# Altium PCB DS137-1.0-B二氧化硫传感器.PcbDoc
Units mil, origin at the board's own origin, x right, y up, seen from the top; angles counter-clockwise.
Board outline 1614.17 x 2519.69 mil, 2 copper layers (Top Layer, Bottom Layer); 18 components, 29 nets, 77 pads, 52 vias.
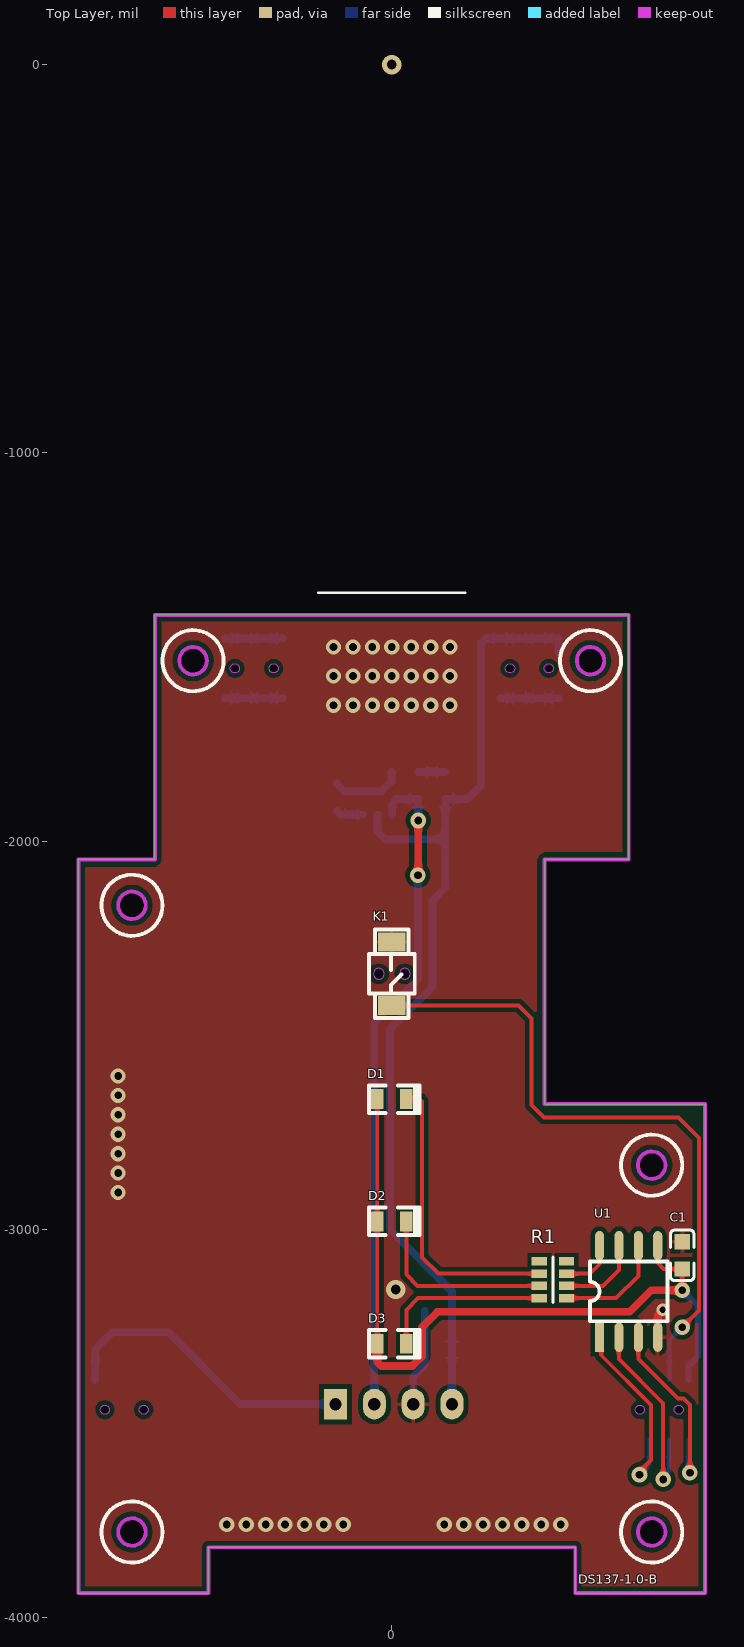
[diagram p0: Top Layer view]
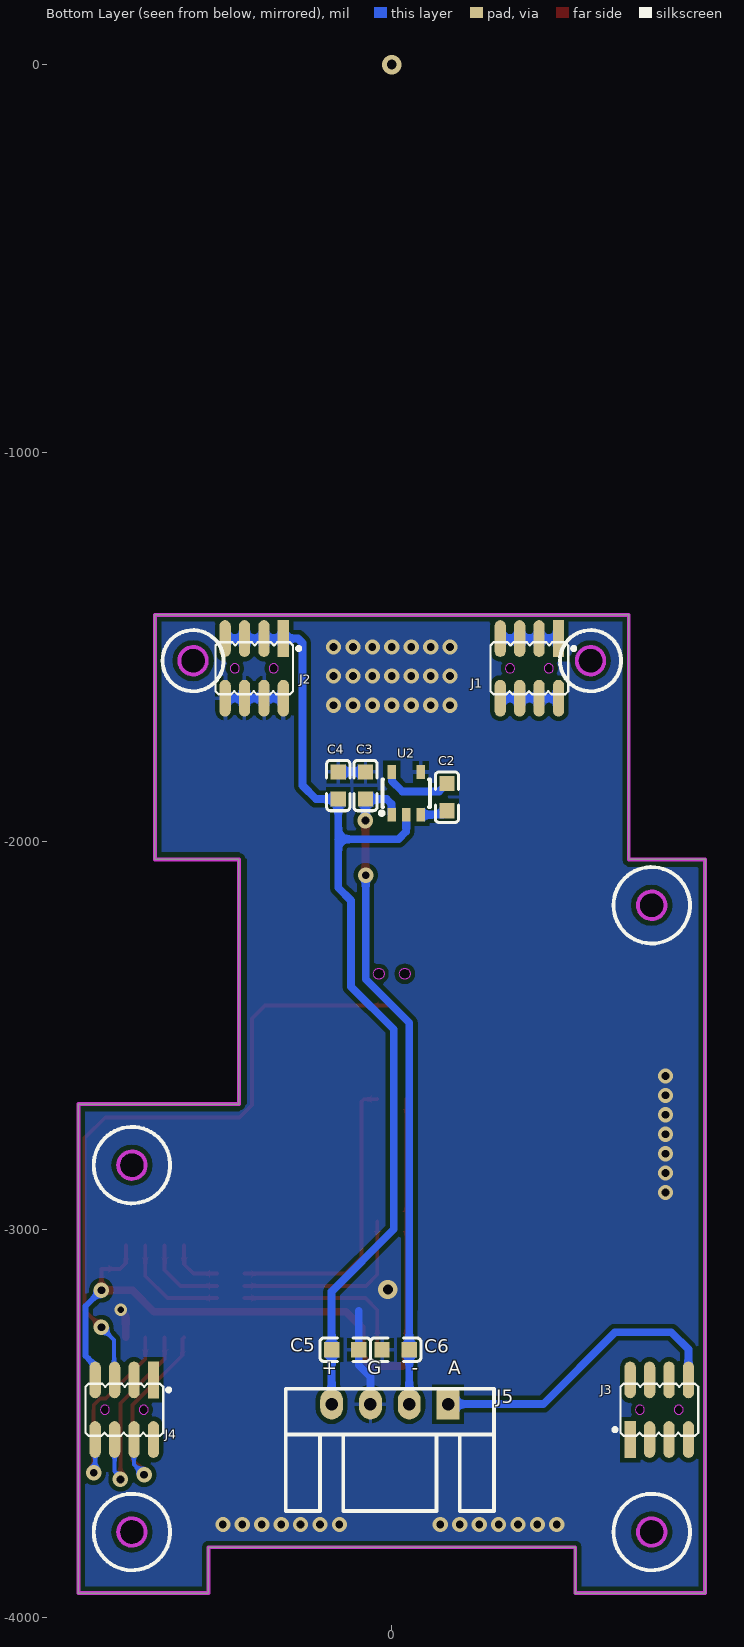
[diagram p1: Bottom Layer view, seen from below]
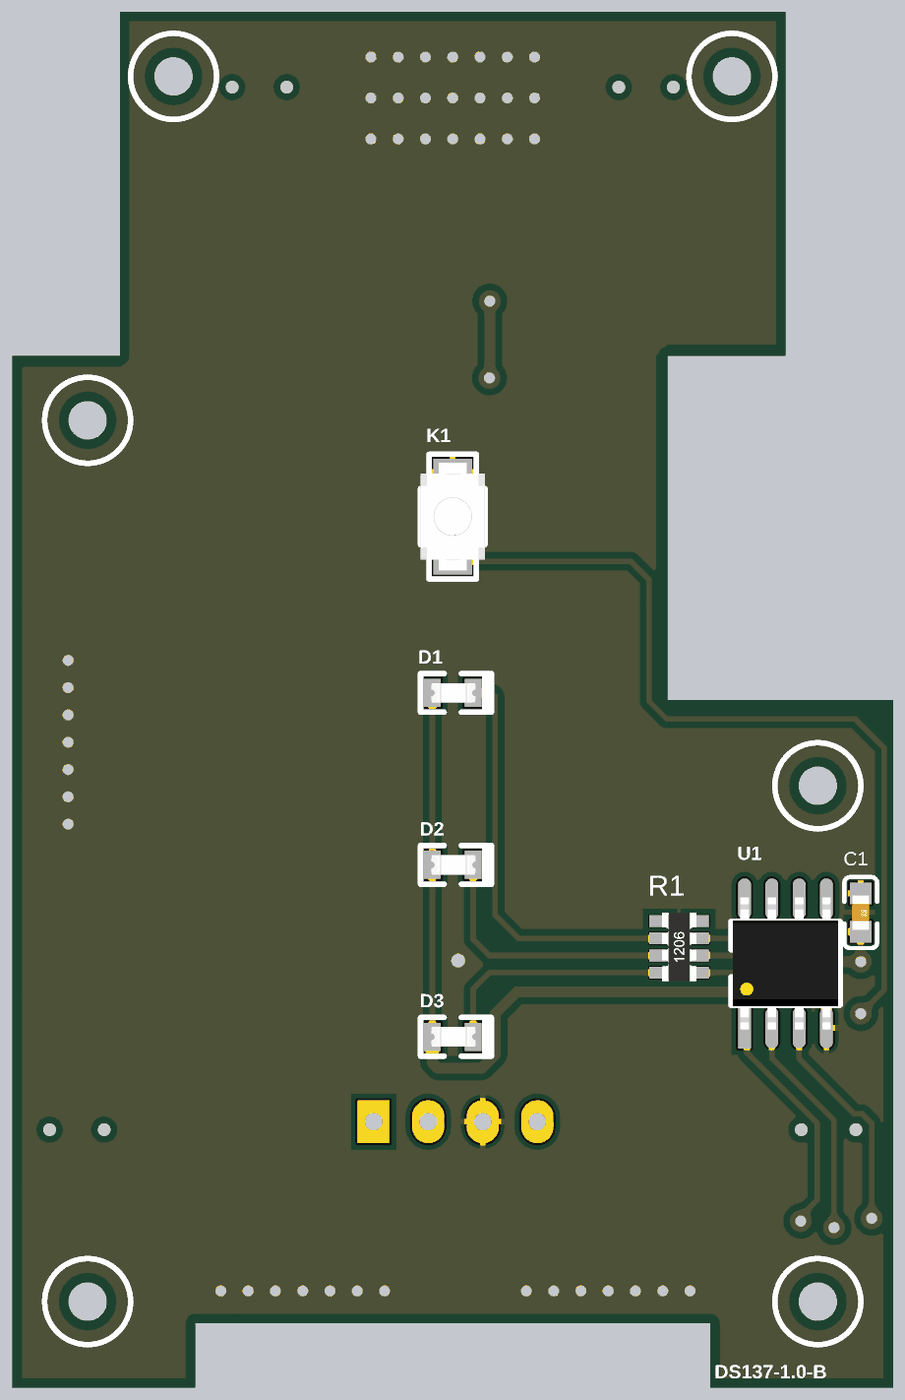
[diagram p2: 3D render of the assembled board from above, using the file's embedded part models]
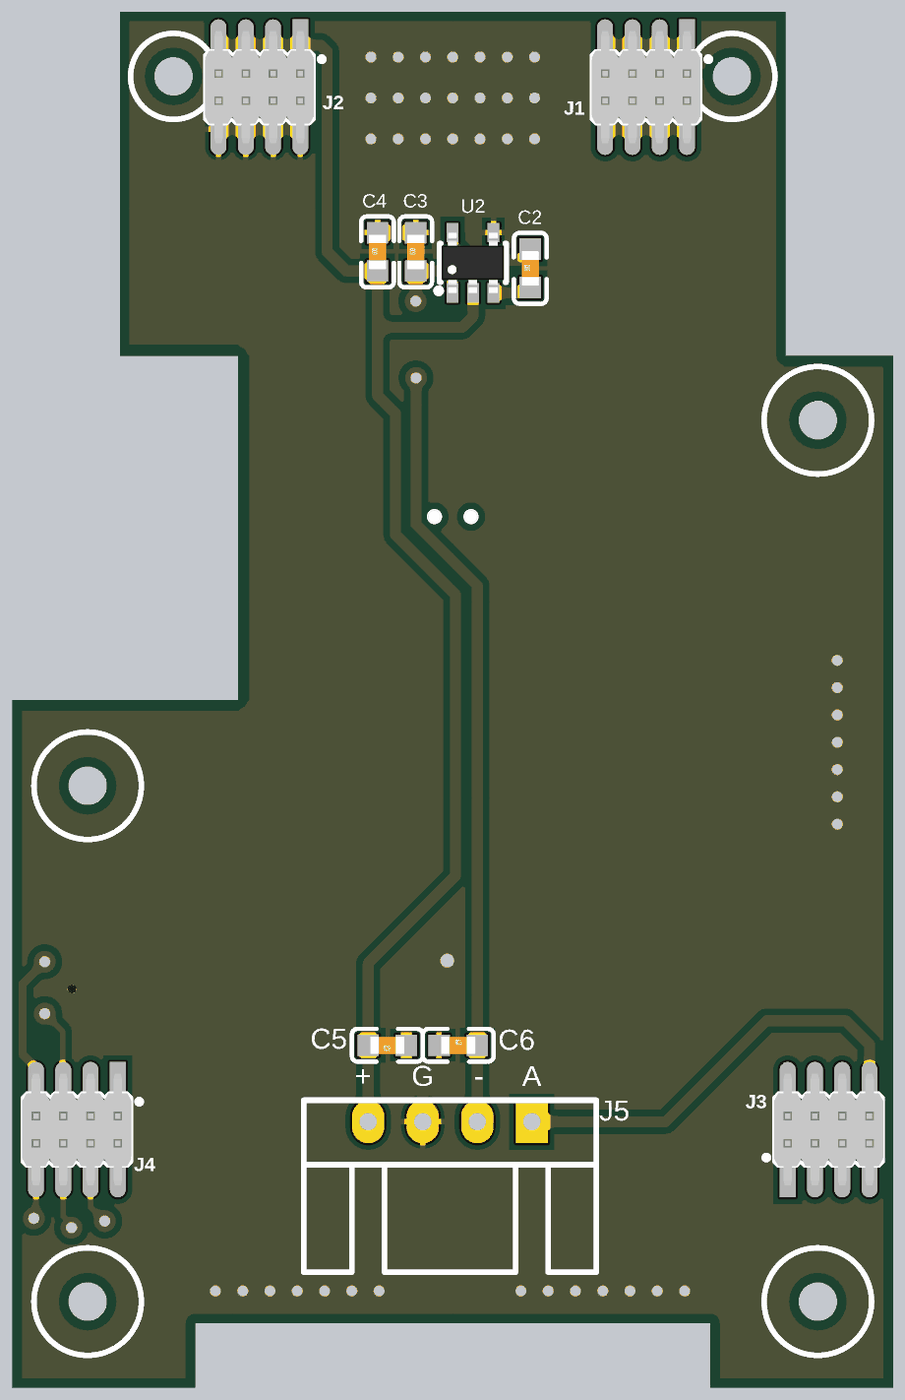
[diagram p3: 3D render of the assembled board from below, using the file's embedded part models]

## Layer stack, top to bottom
Top Solder: solder mask 0.4, Solder Resist, Dk 3.5
Top Layer: signal copper 1.4
Dielectric 1: dielectric 12.6, FR-4, Dk 4.8
Bottom Layer: signal copper 1.4
Bottom Solder: solder mask 0.4, Solder Resist, Dk 3.5

## Board outline
-807.09,-3937.01 -807.09,-2047.24 -610.24,-2047.24 -610.24,-1417.32 610.24,-1417.32 610.24,-2047.24 393.7,-2047.24 393.7,-2677.17 807.09,-2677.17 807.09,-3937.01 472.44,-3937.01 472.44,-3818.9 -472.44,-3818.9 -472.44,-3937.01
cut-out: 633.86,-3779.53 ccw(c669.29,-3779.53) 669.29,-3814.96 ccw(c669.29,-3779.53) 704.72,-3779.53 ccw(c669.29,-3779.53) 669.29,-3744.09 ccw(c669.29,-3779.53)
cut-out: -704.72,-3779.53 ccw(c-669.29,-3779.53) -669.29,-3814.96 ccw(c-669.29,-3779.53) -633.86,-3779.53 ccw(c-669.29,-3779.53) -669.29,-3744.09 ccw(c-669.29,-3779.53)
cut-out: 633.86,-2834.65 ccw(c669.29,-2834.65) 669.29,-2870.08 ccw(c669.29,-2834.65) 704.72,-2834.65 ccw(c669.29,-2834.65) 669.29,-2799.21 ccw(c669.29,-2834.65)
cut-out: -704.72,-2165.35 ccw(c-669.29,-2165.35) -669.29,-2200.79 ccw(c-669.29,-2165.35) -633.86,-2165.35 ccw(c-669.29,-2165.35) -669.29,-2129.92 ccw(c-669.29,-2165.35)
cut-out: 476.38,-1535.43 ccw(c511.81,-1535.43) 511.81,-1570.87 ccw(c511.81,-1535.43) 547.24,-1535.43 ccw(c511.81,-1535.43) 511.81,-1500 ccw(c511.81,-1535.43)
cut-out: -511.81,-1570.87 cw(c-511.81,-1535.43) -547.24,-1535.43 cw(c-511.81,-1535.43) -511.81,-1500 cw(c-511.81,-1535.43) -476.38,-1535.43 cw(c-511.81,-1535.43)

## Design rules (kind name [scope] priority, off if disabled: settings)
Clearance [All] p1: gap=6 ignorepadtopadclearanceinfootprint=FALSE except(12: Arc-Fill Arc-Poly Arc-Region Track-Fill Track-Poly Track-Region SMDPad-Fill SMDPad-Poly SMDPad-Region THPad-Fill THPad-Poly THPad-Region Via-Fill Via-Poly Via-Region Fill-Fill Fill-Poly Fill-Region Poly-Poly Poly-Region Region-Region)
PolygonConnect [All] p1: connectstyle=Relief reliefconductorwidth=10 reliefentries=4 polygonreliefangle="90 Angle" airgapwidth=10
RoutingVias [All] p1: holewidth=28 width=50 viastyle="Through Hole" minholewidth=28 minwidth=50 maxholewidth=28 maxwidth=50
SolderMaskExpansion [All] p1: expansion=4 istentingtop=FALSE
Width [All] p1: maxlimit=20 minlimit=10 preferedwidth=10
30 further rules are at their usual default settings.

## Components (designator, comment, footprint, x,y, rotation, side; value= is the part's Value field where it differs from the comment)
C1 "SMDCAP00013" 0603CAP 747.91,-3066.97 r270 top value=100nF
C2 "MLCC 3.3uF 50V ±10％ 0603" 0603CAP -142.09,-1887.01 r90 bottom value=3.3uF
C3 "" 0603CAP 67.91,-1856.89 r90 bottom value=3.3uF
C4 "MLCC 3.3uF 50V ±10％ 0603" 0603CAP 137.91,-1856.89 r90 bottom value=3.3uF
C5 "SMDCAP00013" 0603CAP 119.96,-3310 r0 bottom value=100nF
C6 "SMDCAP00013" 0603CAP -10,-3310 r180 bottom value=100nF
D1 "SMDLED00010" LED_0805 0,-2664.57 r0 top locked value=BLUE
D2 "SMDLED00003" LED_0805 0,-2979.53 r0 top locked value=RED
D3 "Chip 翠绿LED 0805" LED_0805 0,-3294.49 r0 top locked value=GREEN
J1 "X1321WVS-2x04J-C40D53" X1321WVS-2X04J-C40D53 -354.33,-1555.12 r0 bottom locked value=2*4P
J2 "X1321WVS-2x04J-C40D53" X1321WVS-2X04J-C40D53 354.33,-1555.12 r0 bottom locked value=2*4P
J3 "X1321WVS-2x04J-C40D53" X1321WVS-2X04J-C40D53 -688.98,-3464.57 r180 bottom locked value=2*4P
J4 "X1321WVS-2x04J-C40D53" X1321WVS-2X04J-C40D53 688.98,-3464.57 r0 bottom locked value=2*4P
J5 "SL000000034" XH2.54-4PW -145,-3450 r0 bottom value=toC板
K1 "TS-1185-B-A-A-A" KEY_TS-1185-x-A-A-A 0,-2341.73 r270 top locked
R1 "SMDRES05003" 0603RES_Pack4 415,-3129.8 r180 top value=510R
U1 "SMDIC000018" SO-8 610,-3160 r90 top locked value=ULN2001
U2 "SGM3206" SOT23-5 -37.09,-1876.89 r180 bottom value=丝印SL7NL

## Footprints (in the part's own frame and the unit in brackets; to place one, negate y for a bottom-side part, rotate by r counter-clockwise, add the part's x,y. Pads: shape width x height; smd on the part's side, far side on the other; paste and mask are expansions set on the pad)
0603CAP [mm]
  rect 1x1 smd: 1(-0.889,0) 2(0.89,0)
  silkscreen extent -1.65,-0.76 1.65,0.76, body extent -0.8,-0.4 0.8,0.4, height 0.3
0603RES_Pack4 [mm]
  rect 1x0.55 smd mask+0.05: 1(-0.889,1.2) 2(-0.889,0.4) 3(-0.889,-0.4) 4(-0.889,-1.2) 5(0.889,-1.2) 6(0.889,-0.4) 7(0.889,0.4) 8(0.889,1.2)
  silkscreen extent 0,-1.5 0,1.5, body extent -0.8,-1.6 0.8,1.6, height 0.5
KEY_TS-1185-x-A-A-A [mm]
  rect 1.25x1.8 smd: 1(-2.075,0) 2(2.075,0)
  Keep-Out Layer board cut-out: -0.35,0.85 -0.323,0.716 -0.247,0.603 -0.134,0.527 0,0.5 0,0.5 0.134,0.527 0.247,0.603 0.323,0.716 0.35,0.85 0.35,0.85 0.323,0.984 0.247,1.097 0.134,1.173 0,1.2 0,1.2 -0.134,1.173 -0.247,1.097 -0.323,0.984 -0.35,0.85
  Keep-Out Layer board cut-out: 0.35,-0.85 0.323,-0.716 0.247,-0.603 0.134,-0.527 0,-0.5 0,-0.5 -0.134,-0.527 -0.247,-0.603 -0.323,-0.716 -0.35,-0.85 -0.35,-0.85 -0.323,-0.984 -0.247,-1.097 -0.134,-1.173 0,-1.2 0,-1.2 0.134,-1.173 0.247,-1.097 0.323,-0.984 0.35,-0.85
  silkscreen extent -2.9,-1.5 2.9,1.5, body extent -2.5,-1.5 2.5,1.5, height 2
LED_0805 [mm]
  rect 0.8x1.3 smd: 1(-0.95,0) 2(0.95,0)
  silkscreen extent -1.5,-0.9 1.8,0.9, body extent -1,-0.45 1.06,0.45, height 0.85
SO-8 [mm]
  rect 1.9x0.6 smd: 1(-3,1.905)
  oval 1.9x0.6 smd: 2(-3,0.635) 3(-3,-0.635) 4(-3,-1.905) 5(3,-1.905) 6(3,-0.635) 7(3,0.635) 8(3,1.905)
  silkscreen extent -1.95,-2.54 1.95,2.54, body extent -3.07,-2.44 3.07,2.44, height 1.77
SOT23-5 [mm] "SOT-23/SC-74A; 5 Leads; Body 3.1 x 3 mm, inc. leads (LxW max)"
  rect 0.55x0.9 smd: 1(-0.95,-1.4) 2(0,-1.4) 3(0.95,-1.4) 4(0.95,1.4) 5(-0.95,1.4)
  silkscreen extent -1.7,-1.4 1.55,0.9, body extent -1.45,-1.4 1.45,1.4, height 1.45
X1321WVS-2X04J-C40D53 [mm]
  rect 0.74x2.4 smd: 1(-1.905,-1.95)
  oval 0.74x2.4 smd: 2(-1.905,1.95) 3(-0.635,-1.95) 4(-0.635,1.95) 5(0.635,-1.95) 6(0.635,1.95) 7(1.905,-1.95) 8(1.905,1.95)
  Keep-Out Layer board cut-out: 1.57,0 1.547,0.115 1.482,0.212 1.385,0.277 1.27,0.3 1.27,0.3 1.155,0.277 1.058,0.212 0.993,0.115 0.97,0 0.97,0 0.993,-0.115 1.058,-0.212 1.155,-0.277 1.27,-0.3 1.27,-0.3 1.385,-0.277 1.482,-0.212 1.547,-0.115 1.57,0
  Keep-Out Layer board cut-out: -1.57,0 -1.547,-0.115 -1.482,-0.212 -1.385,-0.277 -1.27,-0.3 -1.27,-0.3 -1.155,-0.277 -1.058,-0.212 -0.993,-0.115 -0.97,0 -0.97,0 -0.993,0.115 -1.058,0.212 -1.155,0.277 -1.27,0.3 -1.27,0.3 -1.385,0.277 -1.482,0.212 -1.547,0.115 -1.57,0
  silkscreen extent -3,-1.7 2.54,1.7, body extent -2.54,-2.6 2.54,2.6, height 5.5
XH2.54-4PW [mm]
  rect 1.5x2 hole 0.813: 1(0,0)
  oval 1.5x2 hole 0.813: 2(2.54,0) 3(5.08,0) 4(7.62,0)
  silkscreen extent -3,-1 10.62,7, body extent -2.5,0 10.1,7.04, height 6

## Part data
C1 C5 C6: library part "MLCC 100nF 50V ±10％ 0603", "贴片电容"
C2 C4: "贴片电容"
C3: library part "MLCC 3.3uF 50V ±10％ 0603", "贴片电容"
D1: library part "Chip 蓝色LED 0805", "贴片LED"
D2: library part "Chip 红色LED 0805", "贴片LED"
D3: "贴片LED"
J1 J2 J3 J4: "双排针2x4P 立贴 1.27mm"
J5: library part "XH2.54mm-4AW 弯针座", "4P弯针座"
K1: "轻触开关"
R1: library part "Chip R*4 510R 1/16W ±5％ 0603", "贴片排阻"
U1: library part "ULN2001 SOP-8", "电机驱动芯片"
U2: "电荷泵芯片"

## Via types
v1: diameter 39.37, hole 19.68, Top Layer to Bottom Layer, tented both sides, 42 vias
v2: diameter 40, hole 20, Top Layer to Bottom Layer, tented both sides, 7 vias
v3: diameter 50, hole 25, Top Layer to Bottom Layer, tented both sides, 2 vias
v4: diameter 32, hole 16, Top Layer to Bottom Layer, tented both sides, 1 vias

## Nets (pads, with @x,y where several pads share a name; then routed paths per layer and width w, separated by ;. In a path a pad name is that pad's centre, name@x,y a point inside that pad or via, vN(x,y) a via of type N, cw(c..) or ccw(c..) an arc to the next point about the centre after c; other vN are vias at no path point)
ADC0: J3.8 J5.1 | length 792.6
  Bottom Layer w20: J3.8 -763.98,-3308.98 -720,-3265 -575,-3265 -390,-3450 J5.1
ADC1: J4.2
DAC_OUT: J3.6
Dis_blue_EN: J4.4 U1.1 | length 522.8
  Top Layer w10: U1.1 539.35,-3282.46 539.35,-3324.19 667.91,-3452.76 667.91,-3593.89 637.91,-3623.89 v2(637.91,-3632.01)
  Bottom Layer w10: v2(637.91,-3632.01) 663.98,-3605.94 J4.4
Dis_green_EN: J4.8 U1.3 | length 499.6
  Top Layer w10: U1.3 635,-3334.09 736.66,-3435.76 750.91,-3435.76 767.79,-3452.63 767.79,-3466.88 767.91,-3467.01 v2(767.91,-3627.01)
  Bottom Layer w10: J4.8 763.98,-3623.07 v2(767.91,-3627.01)
Dis_red_EN: J4.6 U1.2 | length 522
  Top Layer w10: U1.2 585,-3334.09 698.91,-3448.01 v2(698.91,-3644.01)
  Bottom Layer w10: v2(698.91,-3644.01) 698.91,-3638.21 713.98,-3623.15 J4.6
GND: C1.1 C3.2 C4.2 C5.1 C6.1 J2.2 J2.4 J2.6 J2.8 J5.3 K1.1 U1.4 U2.4 | length 548.9
  Top Layer w20: U1.4 685,-3223.17 697.91,-3210.26 v4(697.91,-3207.01)
  Bottom Layer w20: J5.3 55,-3380 84.96,-3350.04 C5.1 84.96,-3210 ; C3.2 C4.2 ; J2.2 J2.4 J2.6 J2.8
  other v1: -425,-3760 -375,-3760 -325,-3760 -275,-3760 -225,-3760 -175,-3760 -125,-3760 135,-3760 185,-3760 235,-3760 285,-3760 335,-3760 385,-3760 435,-3760 -705,-2905 -705,-2855 -705,-2805 -705,-2755 -705,-2705 -705,-2655 -705,-2605 -150,-1650 -100,-1650 -50,-1650 0,-1650 50,-1650 100,-1650 150,-1650 -150,-1575 -100,-1575 -50,-1575 0,-1575 50,-1575 100,-1575 150,-1575 -150,-1500 -100,-1500 -50,-1500 0,-1500 50,-1500 100,-1500 150,-1500
  other v3: 10,-3155
I2C1_SCL: J4.1
I2C1_SDA: J4.3
KEY_HOME: J4.5 K1.2 | length 1717.8
  Top Layer w10: K1.2 326.34,-2423.43 360,-2457.09 360,-2680 392.01,-2712.01 737.91,-2712.01 791.09,-2765.18 791.09,-3208.83 v2(747.91,-3252.01)
  Bottom Layer w10: J4.5 715.3,-3386.47 715.3,-3284.62 v2(747.91,-3252.01)
LED_blue: D1.2 R1.6 | length 763.8
  Top Layer w10: D1.2 37.78,-2664.94 72.06,-2664.94 77.91,-2670.8 77.91,-3072.01 119.96,-3114.05 R1.6
LED_green: D3.2 R1.8 | length 442.2
  Top Layer w10: D3.2 37.4,-3207.52 67.87,-3177.05 R1.8
LED_red: D2.2 R1.7 | length 491.6
  Top Layer w10: D2.2 37.4,-3116.5 66.46,-3145.55 R1.7
NetC2_1: C2.1 U2.3 | length 71.7
  Bottom Layer w20: C2.1 -132.09,-1932.01 U2.3
NetC2_2: C2.2 U2.5 | length 184.9
  Bottom Layer w20: C2.2 -122.05,-1872.01 -27.09,-1872.01 -0.51,-1845.43 -0.51,-1822.6 U2.5
NetR1_1: R1.1 U1.6 | length 286.7
  Top Layer w10: R1.1 577.87,-3177.05 635,-3119.92 U1.6
NetR1_2: R1.2 U1.7 | length 214.9
  Top Layer w10: R1.2 544.37,-3145.55 585,-3104.92 U1.7
NetR1_3: R1.3 U1.8 | length 143
  Top Layer w10: R1.3 510.87,-3114.05 535,-3089.92 U1.8
SPI2_CS: J3.4
SPI2_MISO: J3.1
SPI2_MOSI: J3.3
SPI2_SCK: J3.2
USART2_RXD: J3.5
USART2_TXD: J3.7
VBUS: J1.2 J1.4 J1.6 J1.8 | length 150
  Bottom Layer w20: J1.2 J1.4 J1.6 J1.8
VCC_3V3_MCU: C1.2 D1.1 D2.1 D3.1 J4.7 U1.5 | length 2023.9
  Top Layer w10: D3.1 D2.1 D1.1 ; U1.5 685,-3087.01 700,-3102.01 C1.2 v2(747.91,-3157.01) v2@742.33,-3157.01
  Top Layer w20: D3.1 -37.4,-3341.69 -27.24,-3351.85 53.07,-3351.85 77.91,-3327.01 77.91,-3252.01 117.91,-3212.01 612.91,-3212.01 667.91,-3157.01 v2(747.91,-3157.01)
  Bottom Layer w15: v2(747.91,-3157.01) 788.59,-3197.68 788.59,-3326.41 771.04,-3343.96 771.04,-3344.23 763.98,-3351.29 J4.7
VCC_5V: C4.1 C5.2 J2.1 J2.3 J2.5 J2.7 J5.4 U2.2 | length 2622.6
  Bottom Layer w20: U2.2 -37.09,-1975 -17.09,-1995 137.91,-1995 ; J5.4 155,-3210 155,-3160 -5,-3000 -5,-2485 105,-2375 105,-2152.91 137.91,-2120 137.91,-1995 ; J2.7@429.33,-1513.5 J2.7 J2.5 J2.3 J2.1 241.65,-1478.35 230,-1490 230,-1856.89 195,-1891.89 C4.1 137.91,-1995
VCC_-5V: C3.1 C6.2 J5.2 U2.1 | length 1705.3
  Top Layer w20: v2(67.24,-2087.76) 67.91,-2087.09 v2(67.91,-1947.01)
  Bottom Layer w20: J5.2 -45,-3210.04 -45.04,-3210 -45.04,-2468.01 67.24,-2355.72 v2(67.24,-2087.76) ; U2.1 1.14,-1931.18 1.14,-1903.61 12.86,-1891.89 C3.1 v2(67.91,-1947.01)
VSS: J1.1 J1.3 J1.5 J1.7 | length 150
  Bottom Layer w20: J1.1 J1.3 J1.5 J1.7
pads on no net: R1.4 R1.5
copper on no net:
  other v3: 0,0

## Polygon pours and split planes (outlines as drawn)
GND on Bottom Layer "GND_L02_P004" (solid, remove dead copper, pour order 4): 482.91,-3807.01 482.91,-3927.01 802.91,-3927.01 802.91,-2697.01 392.91,-2697.01 372.91,-2677.01 372.91,-2047.01 392.91,-2027.01 602.91,-2027.01 602.91,-1427.01 -597.09,-1427.01 -597.09,-2057.01 -607.09,-2067.01 -787.09,-2067.01 -797.09,-2077.01 -797.09,-3917.01 -787.09,-3927.01 -487.09,-3927.01 -477.09,-3917.01 -477.09,-3807.01
GND on Top Layer "GND_L01_P005" (solid, remove dead copper, pour order 5): 482.91,-3807.01 482.91,-3927.01 802.91,-3927.01 802.91,-2697.01 392.91,-2697.01 372.91,-2677.01 372.91,-2047.01 392.91,-2027.01 602.91,-2027.01 602.91,-1427.01 -597.09,-1427.01 -597.09,-2057.01 -607.09,-2067.01 -787.09,-2067.01 -797.09,-2077.01 -797.09,-3917.01 -787.09,-3927.01 -487.09,-3927.01 -477.09,-3917.01 -477.09,-3807.01

## Keep-outs
Keep-Out Layer:
  circle w10: c-669.29,-3779.53 r35.43
  circle w10: c669.29,-3779.53 r35.43
  circle w10: c-669.29,-2165.35 r35.43
  circle w10: c511.81,-1535.43 r35.43
  circle w10: c-511.81,-1535.43 r35.43
  circle w10: c669.29,-2834.65 r35.43
  lines w10: -807.09,-3937.01 -472.44,-3937.01 -472.44,-3818.9 472.44,-3818.9 472.44,-3937.01 807.09,-3937.01 807.09,-2677.17 393.7,-2677.17 393.7,-2047.24 610.24,-2047.24 610.24,-1417.32 -610.24,-1417.32 -610.24,-2047.24 -807.09,-2047.24 -807.09,-3937.01

## Silkscreen, mask and mechanical layers (free items; w line width, h text height)
Top Overlay:
  circle w10: c-669.29,-3779.53 r78.74
  circle w10: c669.29,-3779.53 r78.74
  circle w10: c669.29,-2834.65 r78.74
  circle w10: c-669.29,-2165.35 r78.74
  circle w10: c-511.81,-1535.43 r78.74
  circle w10: c511.81,-1535.43 r78.74
  lines w5.91: -190,-1360.24 190,-1360.24 -190,-1360.24
  text "DS137-1.0-B" at 480,-3920 h40
Bottom Overlay:
  circle w10: c-669.29,-3779.53 r98.43
  circle w10: c669.29,-3779.53 r98.43
  circle w10: c669.29,-2834.65 r98.43
  circle w10: c-669.29,-2165.35 r98.43
  circle w10: c-511.81,-1535.43 r78.74
  circle w10: c511.81,-1535.43 r78.74
  text "+     G     -     A" at 180,-3384.33 h60
Mechanical 1:
  circle w10: c669.29,-2834.65 r35.43
  circle w10: c-511.81,-1535.43 r35.43
  circle w10: c511.81,-1535.43 r35.43
  circle w10: c-669.29,-2165.35 r35.43
  circle w10: c669.29,-3779.53 r35.43
  circle w10: c-669.29,-3779.53 r35.43
  lines w10: -807.09,-3937.01 -472.44,-3937.01 -472.44,-3818.9 472.44,-3818.9 472.44,-3937.01 807.09,-3937.01 807.09,-2677.17 393.7,-2677.17 393.7,-2047.24 610.24,-2047.24 610.24,-1417.32 -610.24,-1417.32 -610.24,-2047.24 -807.09,-2047.24 -807.09,-3937.01
Mechanical 15:
  circle w10: c0,-3294.49 r23.62
  circle w10: c0,-2979.53 r23.62
  circle w10: c0,-2664.57 r23.62
  circle w10: c0,-2341.73 r59.06
  lines w5.91: -176.57,-1417.32 -176.57,-1748.43 176.57,-1748.43 176.57,-1417.32
  lines w20: -629.92,-2007.87 629.92,-2007.87